# Altium PCB buttons.PcbDoc
Units mil, origin at the board's own origin, x right, y up, seen from the top; angles counter-clockwise.
Board outline 325 x 1400 mil, 2 copper layers (Top Layer, Bottom Layer); 6 components, 91 nets, 18 pads, 0 vias.
Unrouted connection lines stored in the file: 2.
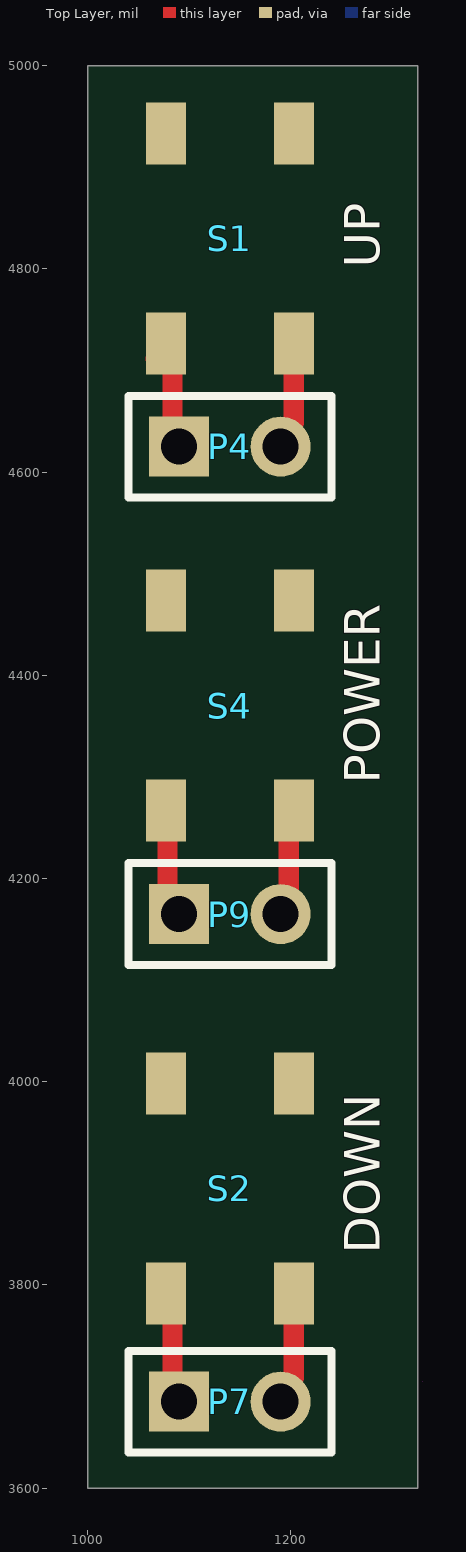
[diagram p0: Top Layer view]
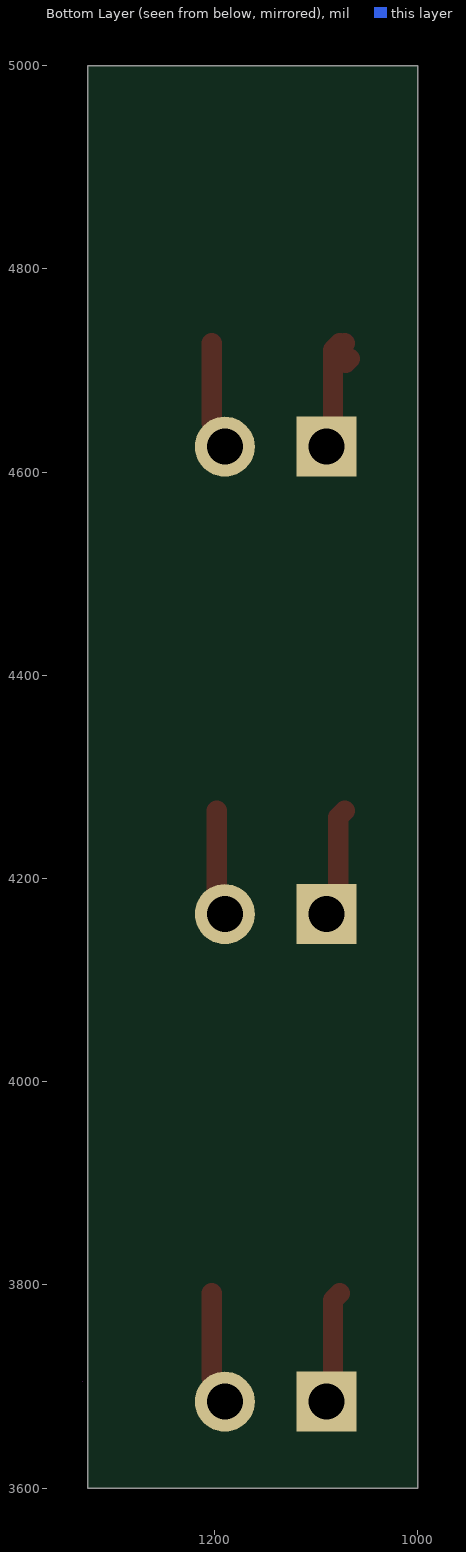
[diagram p1: Bottom Layer view, seen from below]

## Layer stack, top to bottom
Top Solder: solder mask 0.4, Solder Resist, Dk 3.5
Top Layer: signal copper 1.4
Dielectric 1: dielectric 12.6, FR-4, Dk 4.8
Bottom Layer: signal copper 1.4
Bottom Solder: solder mask 0.4, Solder Resist, Dk 3.5

## Board outline
1000,3600 1000,5000 1325,5000 1325,3600
cut-out: 1330,3705

## Design rules (kind name [scope] priority, off if disabled: settings)
Clearance [All] p1: gap=10 ignorepadtopadclearanceinfootprint=FALSE except(0: Arc-Hole Track-Hole SMDPad-Hole THPad-Hole Via-Hole Fill-Hole Poly-Hole Region-Hole Text-Hole)
DiffPairsRouting [All] p1: maxlimit=10 minlimit=10 mostfreqgap=10 toplayer_minwidth=15 toplayer_maxwidth=15 toplayer_prefwidth=15 bottomlayer_minwidth=15 bottomlayer_maxwidth=15 bottomlayer_prefwidth=15 maxuncoupledlength=500
PolygonConnect [All] p1: connectstyle=Relief reliefconductorwidth=10 reliefentries=4 polygonreliefangle="90 Angle" airgapwidth=10
RoutingVias [All] p1: holewidth=28 width=50 viastyle="Through Hole" minholewidth=28 minwidth=50 maxholewidth=28 maxwidth=50
SolderMaskExpansion [All] p1: expansion=4 istentingtop=FALSE
Width [All] p1: maxlimit=20 minlimit=10 preferedwidth=10 minimp=50.000000 maximp=50.000000 favimp=50.000000
29 further rules are at their usual default settings.

## Classes and differential pairs
differential pair class USB: USB
net class UART: A8 A10 A12 A14 A16 A20 B13 P23 R24 T2 U1
net class QSPI: AC15 AC17 AC19 AD12 AD16 AD18
net class LCD: L1 M2 N1 P2 R1
differential pair USB: +USB_P -USB_N

## Components (designator, comment, footprint, x,y, rotation, side; value= is the part's Value field where it differs from the comment)
P4 "UP" HDR1X2 1090,4625 r0 top
P7 "DOWN" HDR1X2 1090,3685 r0 top
P9 "POWER" HDR1X2 1090,4165 r0 top
S1 "PTS647" "SW_CK_ PTS647SK50SMTR2LFS" 1140,4830 r90 top
S2 "PTS647" "SW_CK_ PTS647SK50SMTR2LFS" 1140,3895 r90 top
S4 "PTS647" "SW_CK_ PTS647SK50SMTR2LFS" 1140,4370 r90 top

## Footprints (in the part's own frame and the unit in brackets; to place one, negate y for a bottom-side part, rotate by r counter-clockwise, add the part's x,y. Pads: shape width x height; smd on the part's side, far side on the other; paste and mask are expansions set on the pad)
HDR1X2 [mm] "Connector; Header; 2 Position"
  rect 1.5x1.5 hole 0.9: 1(0,0)
  round 1.5 hole 0.9: 2(2.54,0)
  silkscreen extent -1.27,-1.27 3.81,1.27
"SW_CK_ PTS647SK50SMTR2LFS" [mm] "Tactile Switch SPST-NO Top Actuated Surface Mount"
  rect 1.55x1 smd: 1(-2.625,1.6) 2(2.625,1.6) 3(-2.625,-1.6) 4(2.625,-1.6)

## Part data
P4 P7 P9: library part "Header 2", "Header, 2-Pin", LatestRevisionDate=17-Jul-2002, LatestRevisionNote="Re-released for DXP Platform.", Publisher="Altium Limited"
S1 S2 S4: library part "SW_CK_ PTS647SK50SMTR2LFS", "Tactile Switch SPST-NO Top Actuated Surface Mount", ComponentLink1Description=Digikey, ComponentLink1URL=https://www.digikey.com/product-detail/en/c-k/PTS-647-SK50-SMTR2-LFS/PTS647SK50SMTR2LFSCT-ND/9649868, ComponentLink2Description=Datasheet, ComponentLink2URL=https://dznh3ojzb2azq.cloudfront.net/products/Tactile/PTS647/documents/datasheet.pdf

## Nets (pads, with @x,y where several pads share a name; then routed paths per layer and width w, separated by ;. In a path a pad name is that pad's centre, name@x,y a point inside that pad or via, vN(x,y) a via of type N, cw(c..) or ccw(c..) an arc to the next point about the centre after c; other vN are vias at no path point)
3.3V: 
A8: 
A10: 
A12: P9.1 S4.1 | length 107
  Top Layer w20: S4.1@1072.01,4266.65 1078.5,4260.16 1078.5,4171.5 P9.1@1085,4165
A14: P4.1 S1.1 | length 134.4
  Top Layer w20: S1.1@1067.01,4711.65 S1.1@1071,4707.66 ; S1.1@1072.01,4726.65 1078.5,4720.16 S1.1@1078.5,4707.66 ; S1.1 1083.5,4720.16 1083.5,4631.5 P4.1
A16: P7.1 S2.1 | length 112
  Top Layer w20: S2.1 1083.5,3785.16 1083.5,3691.5 P7.1
A20: 
AC9: 
AC11: 
AC13: 
AC15: 
AC17: 
AC19: 
AC21: 
AD8: 
AD10: 
AD12: 
AD16: 
AD18: 
AD20: 
AD22: 
B9: 
B11: 
B13: 
B15: 
B17: 
B19: 
CHARGE_STAT: 
G1: 
GND: P4.2 P7.2 P9.2 S1.3 S2.3 S4.3 | length 326.1
  Top Layer w20: P9.2@1185,4165 1185,4175.57 1197.99,4188.56 S4.3@1197.99,4266.65 ; P7.2 1190,3695.57 1202.99,3708.56 S2.3 ; P4.2 1190,4635.57 1202.99,4648.56 S1.3
H2: 
J1: 
J24: 
K2: 
L1: 
L24: 
LCD_LED+: 
M2: 
N1: 
NetC1_1: 
NetC2_1: 
NetC3_1: 
NetC9_2: 
NetC13_2: 
NetC21_1: 
NetC22_1: 
NetC23_1: 
NetC23_2: 
NetC26_2: 
NetC27_2: 
NetC36_1: 
NetD2_1: 
NetD3_1: 
NetFB1_2: 
NetJ1_2: 
NetJ1_3: 
NetJ4_3: 
NetJ4_7: 
NetJ4_8: 
NetJ4_9: 
NetJ4_10: 
NetL2_1: 
NetL5_1: 
NetLS1_2: 
nRF_DCC: 
nRF_DCCH: 
nRF_DEC1: 
nRF_DEC2: 
nRF_DEC3: 
nRF_DEC4_6: 
nRF_DEC5: 
nRF_DECUSB: 
nRF_VBUS: 
P2: 
P23: 
PCB_ANT: 
R1: 
R24: 
REG_OUT: 
T2: 
T23: 
U1: 
U24: 
USB_EARTH: 
USB_N: 
USB_OTG: 
USB_P: 
V23: 
VBAT: 
W24: 
Y23: 
pads on no net: S1.2 S1.4 S2.2 S2.4 S4.2 S4.4

## Silkscreen, mask and mechanical layers (free items; w line width, h text height)
V Cut:
  lines w10: 1000,4075 1325,4075 ; 1000,4535 1325,4535 ; 1000,3600 1325,3600 1325,5000 1000,5000 1000,3600
Mechanical 7:
  the board outline again, w10